# EAGLE board FinalSchematic1.2 (EAGLE 9.6.2)
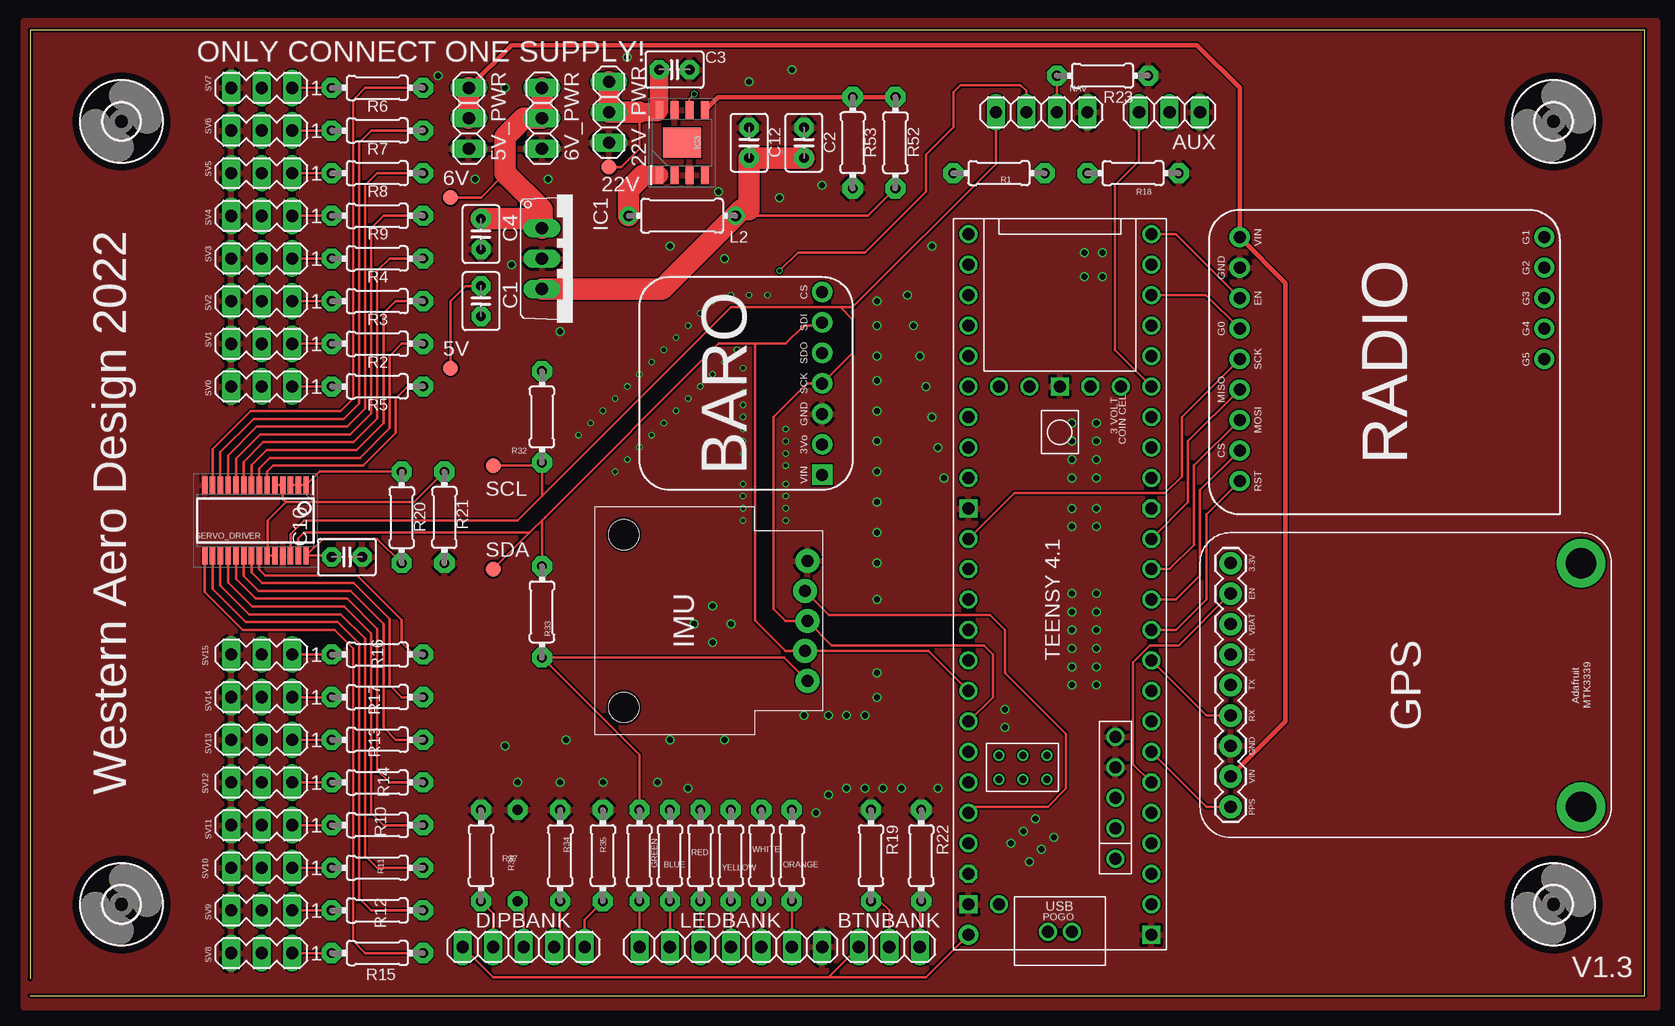
[diagram p0: board, top side]
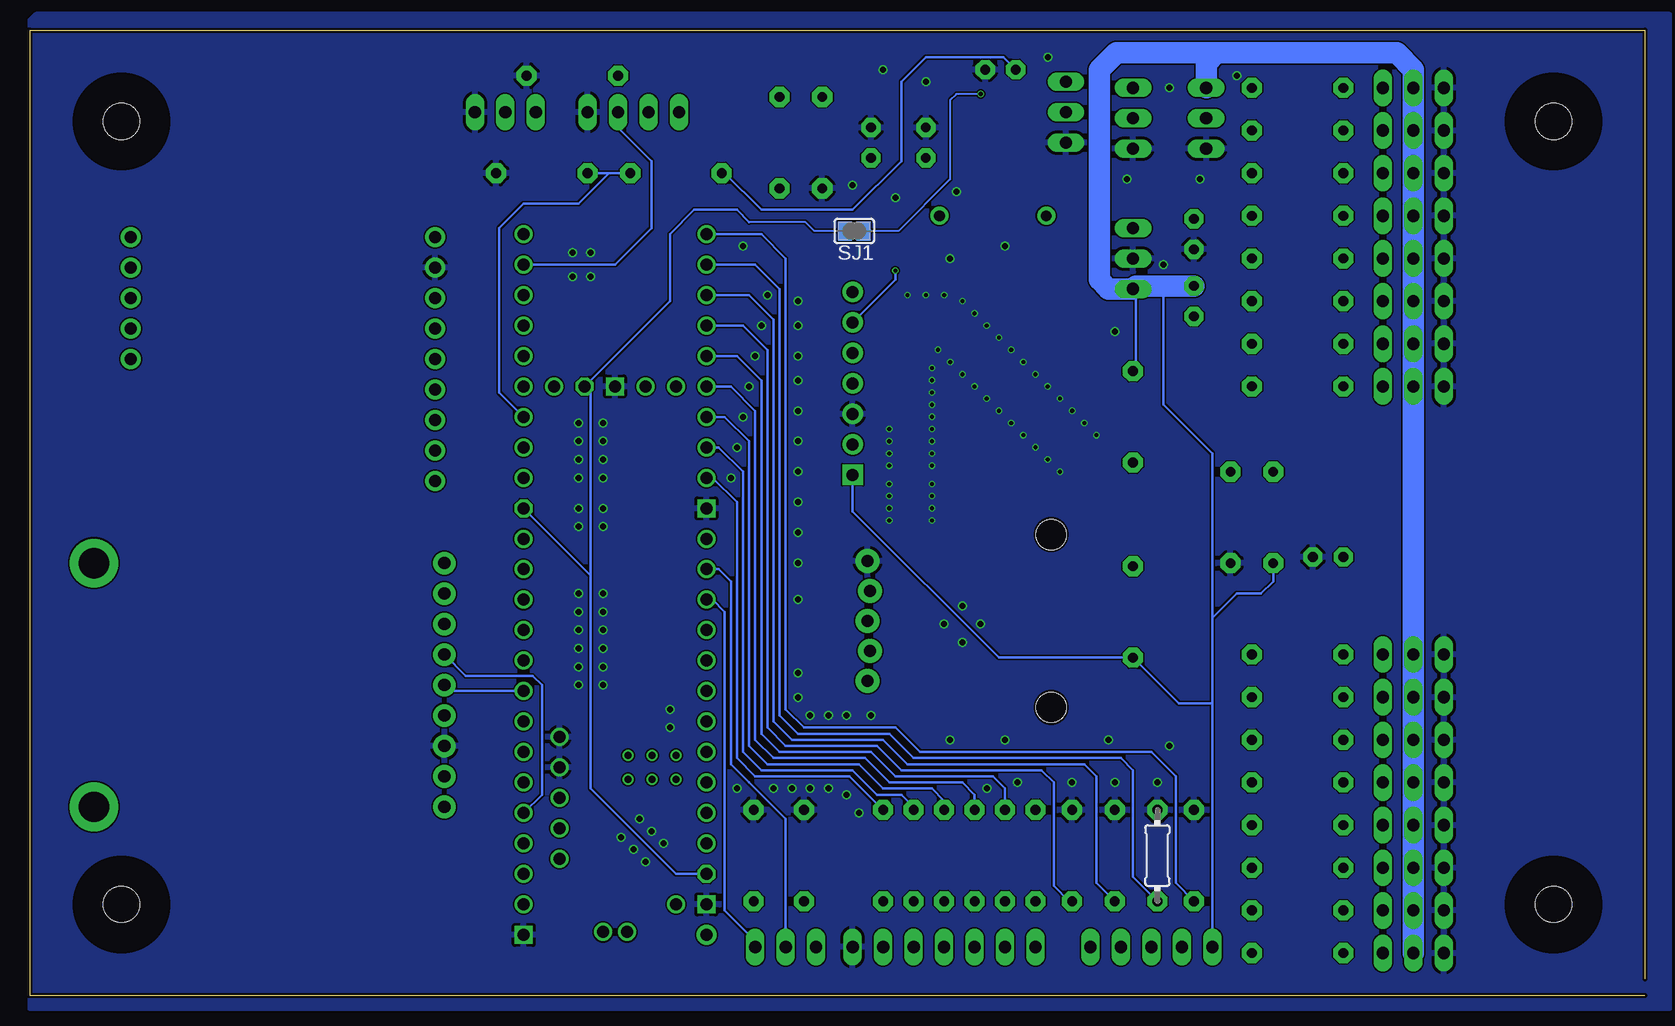
[diagram p1: board, bottom side, seen from below]

Size 134.62 x 80.52 mm. Coordinates in mm from the lower left corner, seen from the top.
Outline: 0,0 134.62,0 134.62,80.52 0,80.52 0,1.4
Copper layers (1*16): Top 0.035559375mm / dielectric 1.6mm / Bottom 0.035559375mm
Design rules "jlcpcb2layer": minimum track width 5mil, minimum drill 12mil, track to track 5mil, track to pad 5mil, pad to pad 5mil, via to via 5mil, smd to smd 5mil, copper to edge 8mil, drill to drill 6mil, minimum pad ring 5mil, minimum via ring 3mil, stop-mask expansion 2.5mil, vias tented up to drill 0mil, thermal gap 10mil

## Footprints (pad centres in the part's own frame; a part is rotated, then mirrored left to right if it is on the bottom)
B1,27 = smd 1.27 x 1.27: TP 0,0
1X03 = drill 1.016 long: 1 -2.54,0; 2 0,0; 3 2.54,0
0204/7 = drill 0.813 pad 1.676 octagon: 1 -3.81,0; 2 3.81,0
C2.5-3 = drill 0.813 pad 1.6 octagon: 1 -1.27,0; 2 1.27,0
1X05 = drill 1.016 long: 1 -5.08,0; 2 -2.54,0; 3 0,0; 4 2.54,0; 5 5.08,0
ADAFRUIT_MTK3339_GPS = drill 1.016 pad 1.88: 3.3V 2.54,2.54; EN 5.08,2.54; FIX 10.16,2.54; GND 17.78,2.54; PPS 22.86,2.54; RX 15.24,2.54; TX 12.7,2.54; VBAT 7.62,2.54; VIN 20.32,2.54 | drill 2.54 pad 4.064: P$1 22.86,31.75; P$2 2.54,31.75
TO220V = drill 1.016 long: 1 -2.54,-2.54; 2 0,-2.54; 3 2.54,-2.54
SOIC127P600X170-9N = smd 1.525 x 0.65: 1 -2.712,1.905; 2 -2.712,0.635; 3 -2.712,-0.635; 4 -2.712,-1.905; 5 2.712,-1.905; 6 2.712,-0.635; 7 2.712,0.635; 8 2.712,1.905 | smd 2.51 x 3.2: 9 0,0
ICM20948BREAKOUT = drill 1 pad 2: 2-6V -5.254,-9.427; GND 4.746,-9.427; INT 2.246,-9.227; SCL -0.254,-9.427; SDA -2.754,-9.227 | hole 2.5: -7.454,5.873; 6.946,5.873
TFI0307 = drill 0.9 pad 1.5: 1 -4.445,0; 2 4.445,0
1X07 = drill 1.016 long: 1 -7.62,0; 2 -5.08,0; 3 -2.54,0; 4 0,0; 5 2.54,0; 6 5.08,0; 7 7.62,0
1X04 = drill 1.016 long: 1 -3.81,0; 2 -1.27,0; 3 1.27,0; 4 3.81,0
ADAFRUIT_RFM95W_LORA_RADIO = drill 1 pad 1.676: 1 2.29,-26.67; 2 4.83,-26.67; 3 7.37,-26.67; 4 9.91,-26.67; 5 12.45,-26.67; 6 14.99,-26.67; 7 17.53,-26.67; 8 20.07,-26.67; 9 22.61,-26.67; 10 2.29,-1.27; 11 4.83,-1.27; 12 7.37,-1.27; 13 9.91,-1.27; 14 12.45,-1.27
SOP65P640X110-28N = smd 1.475 x 0.45: 1 -2.938,4.225; 2 -2.938,3.575; 3 -2.938,2.925; 4 -2.938,2.275; 5 -2.938,1.625; 6 -2.938,0.975; 7 -2.938,0.325; 8 -2.938,-0.325; 9 -2.938,-0.975; 10 -2.938,-1.625; 11 -2.938,-2.275; 12 -2.938,-2.925; 13 -2.938,-3.575; 14 -2.938,-4.225; 15 2.938,-4.225; 16 2.938,-3.575; 17 2.938,-2.925; 18 2.938,-2.275; 19 2.938,-1.625; 20 2.938,-0.975; 21 2.938,-0.325; 22 2.938,0.325; 23 2.938,0.975; 24 2.938,1.625; 25 2.938,2.275; 26 2.938,2.925; 27 2.938,3.575; 28 2.938,4.225
SJ = smd 1.168 x 1.6: 1 -0.762,0; 2 0.762,0
MA03-1 = drill 1.016 long: 1 -2.54,0; 2 0,0; 3 2.54,0
TEENSY41 = drill 1: 0-RX1/CS1/CRX2 -27.94,-7.62; 1-TX1/MISO1/CTX2 -25.4,-7.62; 2-OUT2 -22.86,-7.62; 3-LRCLK2 -20.32,-7.62; 4-BCLK2 -17.78,-7.62; 5-IN2 -15.24,-7.62; 6-OUT1D -12.7,-7.62; 7-RX2/OUT1A -10.16,-7.62; 8-TX2/IN1 -7.62,-7.62; 9-OUT1C -5.08,-7.62; 10-CS\MQSR -2.54,-7.62; 11-MOSI/CTX1 0,-7.62; 12-MISO/MQSL 2.54,-7.62; 13-SCK/LED 2.54,7.62; 14-A0/TX3/SPDIF_OUT 0,7.62; 15-A1/RX3/SPDIF_IN -2.54,7.62; 16-A2/RX4/SCL1 -5.08,7.62; 17-A3/TX4/SDA1 -7.62,7.62; 18-A4/SDA0 -10.16,7.62; 19-A5/SCL0 -12.7,7.62; 20-A6/TX5/LRCLK1 -15.24,7.62; 21-A7/RX5/BCLK1 -17.78,7.62; 22-A8/CTX1 -20.32,7.62; 23-A9/CRX1/MCLK1 -22.86,7.62; 24-A10/TX6/SCL2 7.62,-7.62; 25-A11/RX6/SDA2 10.16,-7.62; 26-A12/MOSI1 12.7,-7.62; 27-A13/SCK1 15.24,-7.62; 28-RX7 17.78,-7.62; 29-TX7 20.32,-7.62; 30-CRX3 22.86,-7.62; 31-CTX3 25.4,-7.62; 32-OUT1B 27.94,-7.62; 33-MCLK2 27.94,7.62; 34-RX8 25.4,7.62; 35-TX8 22.86,7.62; 36-PWM 20.32,7.62; 37-PWM 17.78,7.62; 38-A14/CS/IN1 15.24,7.62; 39-A15/CS/OUT1A 12.7,7.62; 40-A16/CS1 10.16,7.62; 41-A17/MISO1 7.62,7.62; +5V -24.13,-4.62; D+ -30.25,-1; D- -30.25,1; DM -21.59,-4.62; DP -19.05,-4.62; GND4 -16.51,-4.62; GND5 -13.97,-4.62; ON/OFF 15.24,5.08; PROGRAM 15.24,2.54; VBAT 15.24,-5.08; VUSB -27.94,5.08 | drill 1 octagon: 3V3-1 5.08,-7.62; 3V3-2 15.24,-2.54; 3V3-3 -25.4,7.62 | drill 0.6: G -15.51,3.08; LED -17.51,3.08; R+ -17.51,5.08; R- -15.51,5.08; T+ -15.51,1.08; T- -17.51,1.08 | drill 1 square: GND1 -30.48,-7.62; GND2 15.24,0; GND3 5.08,7.62; GND6 -27.94,7.62 | drill 1 pad 1.676: VIN -30.48,7.62
ADAFRUIT_BMP280_BAROMETER = drill 1 pad 1.727: 3VO 3.81,2.54; CS 16.51,2.54; GND 6.35,2.54; SCK 8.89,2.54; SDI 13.97,2.54; SDO 11.43,2.54 | drill 1 pad 1.727 square: VIN 1.27,2.54
3,0 = hole 3: 0,0

## Placement (x,y rotation side)
5V  PTR1B1,27  [B1,27]  35.05,52.32 0 top
5V_PWR  [1X03]  36.58,73.15 270 top
6V  PTR1B1,27  [B1,27]  35.05,66.55 0 top
6V_PWR  [1X03]  42.67,73.15 270 top
22V  PTR1B1,27  [B1,27]  48.26,69.09 0 top
22V_PWR  [1X03]  48.26,73.66 270 top
AUX  [1X03]  95,73.66 180 top
BLUE  80  [0204/7]  53.34,11.68 270 top
BTNBANK  [1X03]  71.63,4.06 180 top
C1  10uF  [C2.5-3]  37.59,57.91 270 top
C2  10uF  [C2.5-3]  64.52,71.12 90 top
C3  10uF  [C2.5-3]  53.72,77.22 0 top
C4  10uF  [C2.5-3]  37.59,63.5 270 top
C10  10uF  [C2.5-3]  26.42,36.58 0 top
C12  470uF  [C2.5-3]  59.94,71.12 90 top
DIPBANK  [1X05]  41.15,4.06 180 top
GPSMTK3339  ADAFRUIT_MTK3339_GPS  [ADAFRUIT_MTK3339_GPS]  97.54,38.61 270 top
GREEN  150  [0204/7]  50.8,11.68 270 top
IC1  MIC29310-5.0BT  [TO220V]  45.21,61.47 270 top
IC3  A5975D  [SOIC127P600X170-9N]  54.36,71.12 90 top
IMU  ICM20948BREAKOUTDEVICE  [ICM20948BREAKOUT]  55.37,31.5 90 top
L2  27uH  [TFI0307]  54.36,65.02 180 top
LEDBANK  [1X07]  58.42,4.06 180 top
NAV  [1X04]  84.33,73.66 180 top
ORANGE  150  [0204/7]  63.5,11.68 270 top
R1  1.8M  [0204/7]  80.77,68.58 180 top
R2  220  [0204/7]  28.96,54.36 180 top
R3  220  [0204/7]  28.96,57.91 180 top
R4  220  [0204/7]  28.96,61.47 180 top
R5  220  [0204/7]  28.96,50.8 180 top
R6  220  [0204/7]  28.96,75.69 180 top
R7  220  [0204/7]  28.96,72.14 180 top
R8  220  [0204/7]  28.96,68.58 180 top
R9  220  [0204/7]  28.96,65.02 180 top
R10  220  [0204/7]  28.96,14.22 180 top
R11  220  [0204/7]  28.96,10.67 180 top
R12  220  [0204/7]  28.96,7.11 180 top
R13  220  [0204/7]  28.96,21.34 180 top
R14  220  [0204/7]  28.96,17.78 180 top
R15  220  [0204/7]  28.96,3.56 180 top
R16  220  [0204/7]  28.96,28.45 180 top
R17  220  [0204/7]  28.96,24.89 180 top
R18  430k  [0204/7]  91.95,68.58 180 top
R19  2.2k  [0204/7]  70.1,11.68 270 top
R20  10K  [0204/7]  30.99,39.88 270 top
R21  10K  [0204/7]  34.54,39.88 90 top
R22  2.2k  [0204/7]  74.3,11.68 270 top
R23  2.2k  [0204/7]  89.41,76.71 180 top
R32  4.7k  [0204/7]  42.67,48.26 90 top
R33  4.7k  [0204/7]  42.67,32 270 top
R34  2.2k  [0204/7]  44.2,11.68 270 top
R35  2.2k  [0204/7]  47.75,11.68 270 top
R36  2.2k  [0204/7]  40.64,11.68 270 bottom
R37  2.2k  [0204/7]  37.59,11.68 270 top
R52  1k  [0204/7]  72.14,71.12 270 top
R53  3k  [0204/7]  68.58,71.12 90 top
RADIO  ADAFRUIT_RFM95W_LORA_RADIO  [ADAFRUIT_RFM95W_LORA_RADIO]  127.51,65.53 270 top
RED  150  [0204/7]  55.88,11.68 270 top
SCL  PTR1B1,27  [B1,27]  38.61,44.2 0 top
SDA  PTR1B1,27  [B1,27]  38.61,35.56 0 top
SERVO_DRIVER  PCA9685PW,112  [SOP65P640X110-28N]  18.8,39.62 270 top
SJ1  [SJ]  65.91,63.75 180 bottom
SV0  [MA03-1]  19.3,50.8 180 top
SV1  [MA03-1]  19.3,54.36 180 top
SV2  [MA03-1]  19.3,57.91 180 top
SV3  [MA03-1]  19.3,61.47 180 top
SV4  [MA03-1]  19.3,65.02 180 top
SV5  [MA03-1]  19.3,68.58 180 top
SV6  [MA03-1]  19.3,72.14 180 top
SV7  [MA03-1]  19.3,75.69 180 top
SV8  [MA03-1]  19.3,3.56 180 top
SV9  [MA03-1]  19.3,7.11 180 top
SV10  [MA03-1]  19.3,10.67 180 top
SV11  [MA03-1]  19.3,14.22 180 top
SV12  [MA03-1]  19.3,17.78 180 top
SV13  [MA03-1]  19.3,21.34 180 top
SV14  [MA03-1]  19.3,24.89 180 top
SV15  [MA03-1]  19.3,28.45 180 top
TEENSY4.1  TEENSY41  [TEENSY41]  85.85,35.56 90 top
U1  ADAFRUIT_BMP280_BAROMETER  [ADAFRUIT_BMP280_BAROMETER]  68.58,42.16 90 top
U$1  [3,0]  127,7.62 0 top
U$2  [3,0]  127,72.9 0 top
U$3  [3,0]  7.62,72.9 0 top
U$4  [3,0]  7.62,7.62 0 top
WHITE  90  [0204/7]  60.96,11.68 270 top
YELLOW  150  [0204/7]  58.42,11.68 270 top

## Library data of the parts
5V 6V 22V SCL SDA = testpad
5V_PWR 6V_PWR 22V_PWR AUX BTNBANK DIPBANK LEDBANK NAV = pinhead
BLUE GREEN ORANGE R1-R23 R32-R37 R52 R53 RED WHITE YELLOW = adafruit
C1-C4 C10 C12 = capacitor-wima
GPSMTK3339 RADIO U1 = AERO_Eagle_Library
IC1 = linear
IC3 = A5975D; ARROW_PART_NUMBER: A5975D; ARROW_PRICE-STOCK: https://www.arrow.com/en/products/a5975d/stmicroelectronics; DESCRIPTION: STMICROELECTRONICS - A5975D - DC/DC Boost Regulator, Adjustable, AEC-Q100, 4V to 36V In, 1.235V to 35V/3A Out, 250 kHz, PowerSO-8; HEIGHT: 1.7mm; MANUFACTURER_NAME: STMicroelectronics; MANUFACTURER_PART_NUMBER: A5975D; MOUSER_PART_NUMBER: 511-A5975D; MOUSER_PRICE-STOCK: https://www.mouser.co.uk/ProductDetail/STMicroelectronics/A5975D?qs=LYO3r17CQdO66PebjUe%2FOA%3D%3D
IMU = ICM20948 BREAKOUT; SPICEPREFIX: X
L2 = rcl; SPICEPREFIX: L
SERVO_DRIVER = PCA9685PW_112; ARROW_PART_NUMBER: PCA9685PW,112; ARROW_PRICE-STOCK: https://www.arrow.com/en/products/pca9685pw112/nxp-semiconductors; DESCRIPTION: 16-channel, 12-bit PWM Fm+ I2C-bus LED controller; HEIGHT: 1.1mm; MANUFACTURER_NAME: NXP; MANUFACTURER_PART_NUMBER: PCA9685PW,112; MOUSER_PART_NUMBER: 771-PCA9685PW,112; MOUSER_PRICE-STOCK: https://www.mouser.co.uk/ProductDetail/NXP-Semiconductors/PCA9685PW112/?qs=6YAT8rHPFU9wZqiAeiOMZw%3D%3D
SJ1 = jumper
SV0 SV1-SV15 = con-lstb; OC_FARNELL: unknown; OC_NEWARK: unknown
TEENSY4.1 = teensy
U$1-U$4 = holes

## Nets
3.3V: SJ1.2 TEENSY4.1.3V3-1 TEENSY4.1.3V3-2 TEENSY4.1.3V3-3
5V: 5V.TP 5V_PWR.1 5V_PWR.2 BTNBANK.3 C1.1 C2.1 C10.1 C12.1 DIPBANK.5 GPSMTK3339.VIN GREEN.1 IC1.3 IMU.2-6V L2.1 R20.2 R32.2 R33.2 R52.2 RADIO.1 SERVO_DRIVER.28 SV0.2 SV1.2 SV2.2 SV3.2 SV4.2 SV5.2 SV6.2 SV7.2 SV8.2 SV9.2 SV10.2 SV11.2 SV12.2 SV13.2 SV14.2 SV15.2 TEENSY4.1.VIN U1.VIN
6V: 6V.TP 6V_PWR.1 6V_PWR.2 C4.1 IC1.1
22V_INPUT: 22V.TP 22V_PWR.1 22V_PWR.2 C3.1 IC3.8 R1.2
AUX: AUX.3 TEENSY4.1.27-A13/SCK1
AUX_DATA: TEENSY4.1.6-OUT1D
B_LED: BLUE.1 TEENSY4.1.37-PWM
BATLEVEL: R1.1 R18.2 TEENSY4.1.26-A12/MOSI1
BLUE: BLUE.2 LEDBANK.6
BTN1: BTNBANK.2 R19.2 TEENSY4.1.14-A0/TX3/SPDIF_OUT
BTN2: BTNBANK.1 R22.2 TEENSY4.1.15-A1/RX3/SPDIF_IN
CS0: RADIO.8 TEENSY4.1.10-CS\MQSR
DIP1: DIPBANK.4 R37.2 TEENSY4.1.33-MCLK2
DIP2: DIPBANK.3 R36.2 TEENSY4.1.34-RX8
DIP3: DIPBANK.2 R34.2 TEENSY4.1.35-TX8
DIP4: DIPBANK.1 R35.2 TEENSY4.1.36-PWM
GND: 5V_PWR.3 6V_PWR.3 22V_PWR.3 AUX.1 C2.2 C3.2 C4.2 C10.2 C12.2 GPSMTK3339.GND IC1.2 IC3.3 IC3.7 IMU.GND LEDBANK.1 NAV.1 R18.1 R19.1 R21.1 R22.1 R23.1 R34.1 R35.1 R36.1 R37.1 R53.1 RADIO.2 SERVO_DRIVER.14 SERVO_DRIVER.25 SV0.3 SV1.3 SV2.3 SV3.3 SV4.3 SV5.3 SV6.3 SV7.3 SV8.3 SV9.3 SV10.3 SV11.3 SV12.3 SV13.3 SV14.3 SV15.3 TEENSY4.1.GND1 TEENSY4.1.GND2 TEENSY4.1.GND3 TEENSY4.1.GND4 TEENSY4.1.GND5 TEENSY4.1.GND6 U1.GND
GNDADDRESS: R21.2 SERVO_DRIVER.4 SERVO_DRIVER.5 SERVO_DRIVER.23 SERVO_DRIVER.24
GPS_EN: GPSMTK3339.EN TEENSY4.1.4-BCLK2
GPS_FIX: GPSMTK3339.FIX TEENSY4.1.3-LRCLK2
GPS_PPS: GPSMTK3339.PPS TEENSY4.1.5-IN2
GREEN: GREEN.2 LEDBANK.7
IMU_INT: IMU.INT TEENSY4.1.22-A8/CTX1
MISO0: RADIO.6 TEENSY4.1.12-MISO/MQSL
MOSI0: RADIO.7 TEENSY4.1.11-MOSI/CTX1
N$1: R20.1 SERVO_DRIVER.1 SERVO_DRIVER.2 SERVO_DRIVER.3
N$2: R14.2 SV12.1
N$3: IC3.6 SJ1.1
N$4: AUX.2
N$6: IC3.1 L2.2
N$18: IC3.5 R52.1 R53.2
N$43: R10.2 SV11.1
N$81: R6.2 SV7.1
N$82: R4.2 SV3.1
N$85: R3.2 SV2.1
N$88: R7.2 SV6.1
N$91: R11.2 SV10.1
N$94: R15.2 SV8.1
N$97: R2.2 SV1.1
N$100: R5.2 SV0.1
N$105: R9.2 SV4.1
N$108: R8.2 SV5.1
N$109: R12.2 SV9.1
N$112: R16.2 SV15.1
N$115: R17.2 SV14.1
N$118: R13.2 SV13.1
O_LED: ORANGE.1 TEENSY4.1.41-A17/MISO1
ORANGE: LEDBANK.2 ORANGE.2
PWM0: R5.1 SERVO_DRIVER.6
PWM1: R2.1 SERVO_DRIVER.7
PWM2: R3.1 SERVO_DRIVER.8
PWM3: R4.1 SERVO_DRIVER.9
PWM4: R9.1 SERVO_DRIVER.10
PWM5: R8.1 SERVO_DRIVER.11
PWM6: R7.1 SERVO_DRIVER.12
PWM7: R6.1 SERVO_DRIVER.13
PWM8: R15.1 SERVO_DRIVER.15
PWM9: R12.1 SERVO_DRIVER.16
PWM10: R11.1 SERVO_DRIVER.17
PWM11: R10.1 SERVO_DRIVER.18
PWM12: R14.1 SERVO_DRIVER.19
PWM13: R13.1 SERVO_DRIVER.20
PWM14: R17.1 SERVO_DRIVER.21
PWM15: R16.1 SERVO_DRIVER.22
R_LED: RED.1 TEENSY4.1.38-A14/CS/IN1
RADIO_EN: RADIO.3 TEENSY4.1.32-OUT1B
RADIO_INT: RADIO.4 TEENSY4.1.30-CRX3
RADIO_RST: RADIO.9 TEENSY4.1.9-OUT1C
RED: LEDBANK.5 RED.2
RX2: GPSMTK3339.TX TEENSY4.1.7-RX2/OUT1A
SCK0: RADIO.5 TEENSY4.1.13-SCK/LED
SCL: IMU.SCL NAV.4 R32.1 SCL.TP SERVO_DRIVER.26 TEENSY4.1.19-A5/SCL0 U1.SCK
SDA: IMU.SDA NAV.3 R33.1 SDA.TP SERVO_DRIVER.27 TEENSY4.1.18-A4/SDA0 U1.SDI
SELECT_PIN: NAV.2 R23.2 TEENSY4.1.31-CTX3
TX2: GPSMTK3339.RX TEENSY4.1.8-TX2/IN1
W_LED: TEENSY4.1.40-A16/CS1 WHITE.1
WHITE: LEDBANK.3 WHITE.2
Y_LED: TEENSY4.1.39-A15/CS/OUT1A YELLOW.1
YELLOW: LEDBANK.4 YELLOW.2

## Tracks (layer width: path | path; a pad name or v marks a point on that pad's centre or on a via)
3.3V
  Bottom 0.152: SJ1.2 69.22,63.75 69.98,64.52 74.68,64.52
  Bottom 0.203: TEENSY4.1.3V3-3 80.77,10.16 87.88,17.27 87.88,35.05 | 87.88,35.05 TEENSY4.1.3V3-1 | 87.88,35.05 87.88,50.29 TEENSY4.1.3V3-2 81.28,57.91 81.28,63.5 79.25,65.53 75.69,65.53 74.68,64.52
5V
  Top 0.203: DIPBANK.5 38.61,1.52 66.55,1.52 | 66.55,1.52 BTNBANK.3 | 66.55,1.52 74.68,1.52 TEENSY4.1.VIN | R20.2 28.96,38.1 24.43,38.1 SERVO_DRIVER.28 25.04,36.69 C10.1 | R52.2 69.85,65.02 L2.1 | IMU.2-6V 62.85,28.19 R33.2 50.8,20.07 GREEN.1 | 5V.TP 35.05,57.91 36.32,59.18 C1.1
  Top 0.381: 5V_PWR.1 40.13,79.25 97.28,79.25 100.84,75.69 RADIO.1 104.65,59.43 104.65,22.86 GPSMTK3339.VIN
  Top 1.778: 5V_PWR.1 5V_PWR.2 | IC1.3 52.7,58.93 L2.1 59.31,65.53 59.94,65.53 C12.1 C2.1
  Bottom 0.203: 36.07,31.5 34.04,33.53 32,33.53 30.99,34.54 R20.2 | DIPBANK.5 36.07,24.38 | 36.07,24.38 36.07,31.5 | 36.07,31.5 36.07,45.21 40.13,49.28 40.13,59.18 | R32.2 42.42,52.32 42.42,59.18 | 36.07,24.38 38.86,24.38 R33.2 53.85,28.19 66.04,40.39 U1.VIN
  Bottom 1.778: SV8.2 SV9.2 SV10.2 SV11.2 SV12.2 SV13.2 SV14.2 SV15.2 SV0.2 SV1.2 SV2.2 SV3.2 SV4.2 SV5.2 SV6.2 SV7.2 19.3,77.22 20.7,78.61 35.69,78.61 | 5V_PWR.1 36.58,77.72 35.69,78.61 | 35.69,78.61 44.04,78.61 45.47,77.19 45.47,59.69 44.7,58.93 IC1.3 42.42,59.18 40.13,59.18 C1.1
6V
  Top 0.203: 6V.TP 37.59,66.55 39.62,68.58
  Top 1.778: 6V_PWR.1 6V_PWR.2 41.15,73.15 39.62,71.63 39.62,68.58 42.67,65.53 IC1.1 41.91,64.77 C4.1
22V_INPUT
  Top 0.203: 22V.TP 49.28,69.09 50.8,70.61 50.8,73.66
  Top 1.524: C3.1 IC3.8 52.28,73.66 50.8,73.66
  Top 1.778: 50.8,73.66 49.28,73.66 22V_PWR.2 22V_PWR.1
  Bottom 0.203: C3.1 53.48,78.25 56.05,78.25 56.06,78.23 59.94,78.23 61.98,76.2 61.98,69.6 66.04,65.53 73.66,65.53 76.71,68.58 R1.2
AUX
  Top 0.203: AUX.3 92.46,69.6 90.42,67.56 90.42,53.85 TEENSY4.1.27-A13/SCK1
B_LED
  Bottom 0.203: TEENSY4.1.37-PWM 75.69,53.34 73.66,51.31 73.66,21.84 72.14,20.32 64.52,20.32 62.48,18.29 54.36,18.29 53.34,17.27 BLUE.1
BATLEVEL
  Bottom 0.203: R1.1 86.36,68.58 | 86.36,68.58 R18.2 | TEENSY4.1.26-A12/MOSI1 95.5,50.29 95.5,64.01 93.47,66.04 88.9,66.04 86.36,68.58
BLUE
  Top 0.203: BLUE.2 LEDBANK.6
BTN1
  Top 0.203: R19.2 70.87,7.87 71.63,7.11 BTNBANK.2
  Bottom 0.203: BTNBANK.2 71.63,14.73 74.68,17.78 76.2,19.3 76.2,34.54 77.22,35.56 TEENSY4.1.14-A0/TX3/SPDIF_OUT
BTN2
  Top 0.203: R22.2 74.17,7.75 BTNBANK.1
  Bottom 0.203: BTNBANK.1 74.17,4.57 76.71,7.11 76.71,32 77.72,33.02 TEENSY4.1.15-A1/RX3/SPDIF_IN
CS0
  Top 0.203: TEENSY4.1.10-CS\MQSR 95.5,33.02 97.54,35.05 97.54,42.16 RADIO.8
DIP1
  Top 0.203: R37.2 38.61,6.86 DIPBANK.4
  Bottom 0.203: TEENSY4.1.33-MCLK2 73.66,63.5 71.63,61.47 71.63,23.88 70.1,22.35 62.48,22.35 60.45,20.32 41.15,20.32 39.12,18.29 39.12,9.4 R37.2
DIP2
  Top 0.203: R36.2 41.15,7.37 DIPBANK.3
  Bottom 0.203: TEENSY4.1.34-RX8 74.17,60.96 72.14,58.93 72.14,23.37 70.61,21.84 62.99,21.84 60.96,19.81 43.69,19.81 42.67,18.8 42.67,9.91 R36.2
DIP3
  Top 0.203: R34.2 44.2,4.57 DIPBANK.2
  Bottom 0.203: TEENSY4.1.35-TX8 74.68,58.42 72.64,56.39 72.64,22.86 71.12,21.34 63.5,21.34 61.47,19.3 46.74,19.3 45.72,18.29 45.72,9.4 R34.2
DIP4
  Top 0.203: R35.2 46.23,6.35 DIPBANK.1
  Bottom 0.203: TEENSY4.1.36-PWM 75.18,55.88 73.15,53.85 73.15,22.35 71.63,20.83 64.01,20.83 61.98,18.8 50.29,18.8 49.28,17.78 49.28,9.14 48.01,7.87 R35.2
GND  (via drill 0.35, 0.5)
  Top 0.203: 74.17,15.24 74.17,15.49
  other vias: 45.72,46.74 48.77,43.69 62.99,47.24 59.44,47.24 55.88,56.9 58.93,53.85 54.86,55.88 57.91,52.83 53.85,54.86 56.9,51.82 52.83,53.85 55.88,50.8 51.82,52.83 54.86,49.78 50.8,51.82 53.85,48.77 49.78,50.8 52.83,47.75 48.77,49.78 51.82,46.74 47.75,48.77 50.8,45.72 46.74,47.75 49.78,44.7 62.99,46.23 59.44,46.23 62.99,45.21 59.44,45.21 62.99,44.2 59.44,44.2 62.99,42.67 59.44,42.67 62.99,41.66 59.44,41.66 62.99,40.64 59.44,40.64 62.99,39.62 59.44,39.62 56.9,57.91 58.42,58.42 59.94,58.42 61.47,58.42 59.44,48.26 59.44,49.28 59.44,50.29 59.44,51.31 59.44,52.32 70.61,26.92 70.61,24.89 69.6,23.37 68.07,23.37 64.52,23.37 66.55,23.37 65.53,15.24 66.55,16.76 68.07,17.27 69.6,17.27 71.12,17.27 72.64,17.27 75.69,17.27 81.28,23.88 81.28,22.35 81.79,12.7 83.31,11.18 84.33,12.19 82.8,13.72 83.82,14.73 85.34,13.21 86.87,25.91 86.87,27.43 86.87,28.96 86.87,30.48 88.9,30.48 88.9,28.96 88.9,27.43 88.9,25.91 88.9,32 88.9,33.53 86.87,33.53 86.87,32 88.9,39.12 86.87,39.12 86.87,40.64 88.9,40.64 86.87,43.18 86.87,44.7 86.87,46.23 86.87,47.75 88.9,47.75 88.9,46.23 88.9,44.7 88.9,43.18 87.88,59.94 89.41,59.94 89.41,61.98 87.88,61.98 54.86,17.27 52.32,17.78 47.75,17.78 44.2,17.78 40.64,17.78 39.62,20.83 44.7,21.34 53.34,21.34 57.91,21.34 56.9,29.46 58.42,30.99 56.9,32.51 55.37,30.99 70.61,33.02 70.61,36.07 70.61,38.61 70.61,41.15 70.61,43.69 70.61,46.23 70.61,48.77 70.61,51.31 70.61,53.34 70.61,55.88 70.61,57.91 73.15,58.42 73.66,55.88 74.17,53.34 74.68,50.8 75.18,48.26 75.69,45.72 76.2,43.18 75.18,62.48 62.48,66.55 66.04,67.56 59.94,76.2 49.78,78.23 57.91,61.47 53.34,62.48 57.4,67.06 63.5,77.22 39.62,75.69 43.18,68.07 37.08,68.07 40.13,60.96 44.2,55.37 34.04,76.71
  pour Top: -0.51,81.28 135.64,81.28 135.64,-1.02 -0.51,-1.02
  pour Bottom: -2.03,-1.02 -2.03,81.79 134.11,81.79 134.62,81.28 134.62,-1.02
GNDADDRESS
  Top 0.203: R21.2 32,41.15 21.84,41.15 21.34,41.15 | 21.34,41.15 21.07,41.41 SERVO_DRIVER.4 SERVO_DRIVER.5 | SERVO_DRIVER.24 SERVO_DRIVER.23 19.81,36.73 19.81,39.62 21.34,41.15
GPS_EN
  Top 0.203: GPSMTK3339.EN 95.76,29.21 93.36,29.21 91.95,27.8 91.95,19.3 TEENSY4.1.4-BCLK2
GPS_FIX
  Bottom 0.203: GPSMTK3339.FIX 98.3,26.67 92.71,26.67 91.95,25.91 91.95,16.76 TEENSY4.1.3-LRCLK2
GPS_PPS
  Top 0.203: GPSMTK3339.PPS 98.04,15.75 TEENSY4.1.5-IN2
GREEN
  Top 0.203: GREEN.2 LEDBANK.7
IMU_INT
  Top 0.203: TEENSY4.1.22-A8/CTX1 78.74,15.75 80.77,15.75 84.84,15.75 86.36,17.27 86.36,21.84 81.28,26.92 81.28,30.48 80.01,31.75 66.59,31.75 IMU.INT
MISO0
  Top 0.203: TEENSY4.1.12-MISO/MQSL 96.52,41.15 96.52,46.23 RADIO.6
MOSI0
  Top 0.203: TEENSY4.1.11-MOSI/CTX1 95,35.56 97.03,37.59 97.03,44.2 RADIO.7
N$1
  Top 0.203: SERVO_DRIVER.3 SERVO_DRIVER.2 SERVO_DRIVER.1 24.15,43.69 R20.1
N$2
  Top 0.203: R14.2 SV12.1
N$3  (via drill 0.35)
  Top 0.152: IC3.6 54.99,74.8 v55.37,75.18
  Bottom 0.152: v55.37,75.18 57.4,75.18 57.91,74.68 57.91,68.07 62.23,63.75 SJ1.1
N$6
  Top 1.524: IC3.1 51.1,68.41
  Top 1.778: 51.1,68.41 49.91,67.22 L2.2
N$18
  Top 0.381: IC3.5 57.36,74.93 R53.2 R52.1
N$43
  Top 0.203: R10.2 SV11.1
N$81
  Top 0.203: R6.2 SV7.1
N$82
  Top 0.203: R4.2 SV3.1
N$85
  Top 0.203: R3.2 SV2.1
N$88
  Top 0.203: R7.2 SV6.1
N$91
  Top 0.203: R11.2 SV10.1
N$94
  Top 0.203: R15.2 SV8.1
N$97
  Top 0.203: R2.2 SV1.1
N$100
  Top 0.203: R5.2 SV0.1
N$105
  Top 0.203: R9.2 SV4.1
N$108
  Top 0.203: R8.2 SV5.1
N$109
  Top 0.203: R12.2 SV9.1
N$112
  Top 0.203: R16.2 SV15.1
N$115
  Top 0.203: R17.2 SV14.1
N$118
  Top 0.203: R13.2 SV13.1
O_LED
  Bottom 0.203: TEENSY4.1.41-A17/MISO1 77.72,43.18 75.69,41.15 75.69,19.81 74.17,18.29 66.29,18.29 ORANGE.1
ORANGE
  Top 0.203: ORANGE.2 LEDBANK.2
PWM0
  Top 0.203: SERVO_DRIVER.6 19.77,43.71 20.26,44.2 27.77,44.2 30.48,46.91 30.48,49.78 31.5,50.8 R5.1
PWM1
  Top 0.203: SERVO_DRIVER.7 19.12,43.98 19.99,44.85 27.5,44.85 29.97,47.32 29.97,53.34 30.99,54.36 R2.1
PWM2
  Top 0.203: SERVO_DRIVER.8 18.47,44.24 19.72,45.5 27.23,45.5 29.46,47.73 29.46,56.9 30.48,57.91 R3.1
PWM3
  Top 0.203: SERVO_DRIVER.9 17.82,44.51 19.45,46.15 26.96,46.15 28.96,48.14 28.96,60.45 29.97,61.47 R4.1
PWM4
  Top 0.203: SERVO_DRIVER.10 17.17,44.78 19.18,46.8 26.69,46.8 28.45,48.55 28.45,64.01 29.46,65.02 R9.1
PWM5
  Top 0.203: SERVO_DRIVER.11 16.52,45.05 18.91,47.45 26.42,47.45 27.94,48.96 27.94,67.56 28.96,68.58 R8.1
PWM6
  Top 0.203: SERVO_DRIVER.12 15.87,45.32 18.65,48.1 26.16,48.1 27.43,49.37 27.43,71.12 28.45,72.14 R7.1
PWM7
  Top 0.203: SERVO_DRIVER.13 15.22,45.59 18.38,48.75 25.89,48.75 26.92,49.78 26.92,74.68 27.94,75.69 R6.1
PWM8
  Top 0.203: SERVO_DRIVER.15 14.57,33.66 17.73,30.5 25.38,30.5 26.92,28.96 26.92,4.57 27.94,3.56 R15.1
PWM9
  Top 0.203: SERVO_DRIVER.16 15.22,33.93 18,31.15 25.65,31.15 27.43,29.37 27.43,8.13 28.45,7.11 R12.1
PWM10
  Top 0.203: SERVO_DRIVER.17 15.87,34.2 18.27,31.8 25.92,31.8 27.94,29.78 27.94,11.68 28.96,10.67 R11.1
PWM11
  Top 0.203: SERVO_DRIVER.18 16.52,34.47 18.53,32.45 26.19,32.45 28.45,30.19 28.45,15.24 29.46,14.22 R10.1
PWM12
  Top 0.203: SERVO_DRIVER.19 17.17,34.73 18.8,33.1 26.45,33.1 28.96,30.6 28.96,18.8 29.97,17.78 R14.1
PWM13
  Top 0.203: SERVO_DRIVER.20 17.82,35 19.07,33.75 26.72,33.75 29.46,31.01 29.46,22.35 30.48,21.34 R13.1
PWM14
  Top 0.203: SERVO_DRIVER.21 18.47,35.27 19.34,34.4 26.99,34.4 29.97,31.42 29.97,25.91 30.99,24.89 R17.1
PWM15
  Top 0.203: SERVO_DRIVER.22 19.12,35.54 19.61,35.05 27.26,35.05 30.99,31.33 30.99,29.46 32,28.45 R16.1
R_LED
  Bottom 0.203: TEENSY4.1.38-A14/CS/IN1 76.2,50.8 74.17,48.77 74.17,21.34 72.64,19.81 65.02,19.81 62.99,17.78 56.9,17.78 55.88,16.76 RED.1
RADIO_EN
  Top 0.203: RADIO.3 95.5,63.5 TEENSY4.1.32-OUT1B
RADIO_INT
  Top 0.203: RADIO.4 98.04,58.42 TEENSY4.1.30-CRX3
RADIO_RST
  Top 0.203: TEENSY4.1.9-OUT1C 95.5,30.48 98.04,33.02 98.04,40.13 RADIO.9
RED
  Top 0.203: RED.2 LEDBANK.5
RX2
  Bottom 0.203: GPSMTK3339.TX 99.57,25.4 TEENSY4.1.7-RX2/OUT1A
SCK0
  Top 0.203: TEENSY4.1.13-SCK/LED 82.04,41.91 94.61,41.91 96.01,43.31 96.01,48.26 RADIO.5
SCL
  Top 0.203: 67.56,57.4 68.58,56.39 68.58,53.59 U1.SCK 64.77,51.05 61.98,48.26 61.98,32.26 62.99,31.24 IMU.SCL 66.83,29.21 79.5,29.21 80.26,28.45 80.26,24.89 TEENSY4.1.19-A5/SCL0 | 67.56,57.4 58.42,57.4 42.67,41.66 | SERVO_DRIVER.26 21.72,38.48 22.86,39.62 40.64,39.62 42.67,41.66 | 42.67,41.66 R32.1 42.42,44.2 SCL.TP | NAV.4 80.52,69.34 68.58,57.4 67.56,57.4
SDA  (via drill 0.35)
  Top 0.203: TEENSY4.1.18-A4/SDA0 74.89,28.74 IMU.SDA 62.99,28.74 60.45,31.28 60.45,54.36 | U1.SDI 65.79,55.88 64.52,55.88 62.99,54.36 61.47,54.36 60.96,54.36 60.45,54.36 | 42.93,39.88 57.4,54.36 60.45,54.36 | 42.93,39.88 41.66,38.61 | 41.66,38.61 22.86,38.61 22.37,38.12 SERVO_DRIVER.27 | R33.1 42.67,39.62 42.93,39.88 | NAV.3 83.06,75.44 82.58,75.92 77.57,75.92 76.99,75.34 76.99,72.42 74.68,70.1 74.68,67.06 69.6,61.98 64.01,61.98 v62.48,60.45 | SDA.TP 41.66,38.61
  Bottom 0.203: v62.48,60.45 62.48,59.69 U1.SDI
SELECT_PIN
  Top 0.203: R23.2 NAV.2
  Bottom 0.203: NAV.2 85.6,72.39 82.8,69.6 82.8,64.01 85.85,60.96 TEENSY4.1.31-CTX3
TX2
  Top 0.203: GPSMTK3339.RX 98.04,23.37 TEENSY4.1.8-TX2/IN1
W_LED
  Bottom 0.203: TEENSY4.1.40-A16/CS1 77.22,45.72 75.18,43.69 75.18,20.32 73.66,18.8 66.04,18.8 64.01,16.76 61.98,16.76 60.96,15.75 WHITE.1
WHITE
  Top 0.203: WHITE.2 LEDBANK.3
Y_LED
  Bottom 0.203: TEENSY4.1.39-A15/CS/OUT1A 76.71,48.26 74.68,46.23 74.68,20.83 73.15,19.3 65.53,19.3 63.5,17.27 59.44,17.27 58.42,16.26 YELLOW.1
YELLOW
  Top 0.203: YELLOW.2 LEDBANK.4

## Text on the board
tPlace: ONLY CONNECT ONE SUPPLY!
tNames: Western Aero Design 2022 | V1.3